# Altium PCB BMS_Rev4.PcbDoc (part 1 of 3)
Units mm, origin at the board's own origin, x right, y up, seen from the top; angles counter-clockwise.
Board outline 63.88 x 34.7 mm, 2 copper layers (Top Layer, Bottom Layer); 62 components, 39 nets, 215 pads, 192 vias.
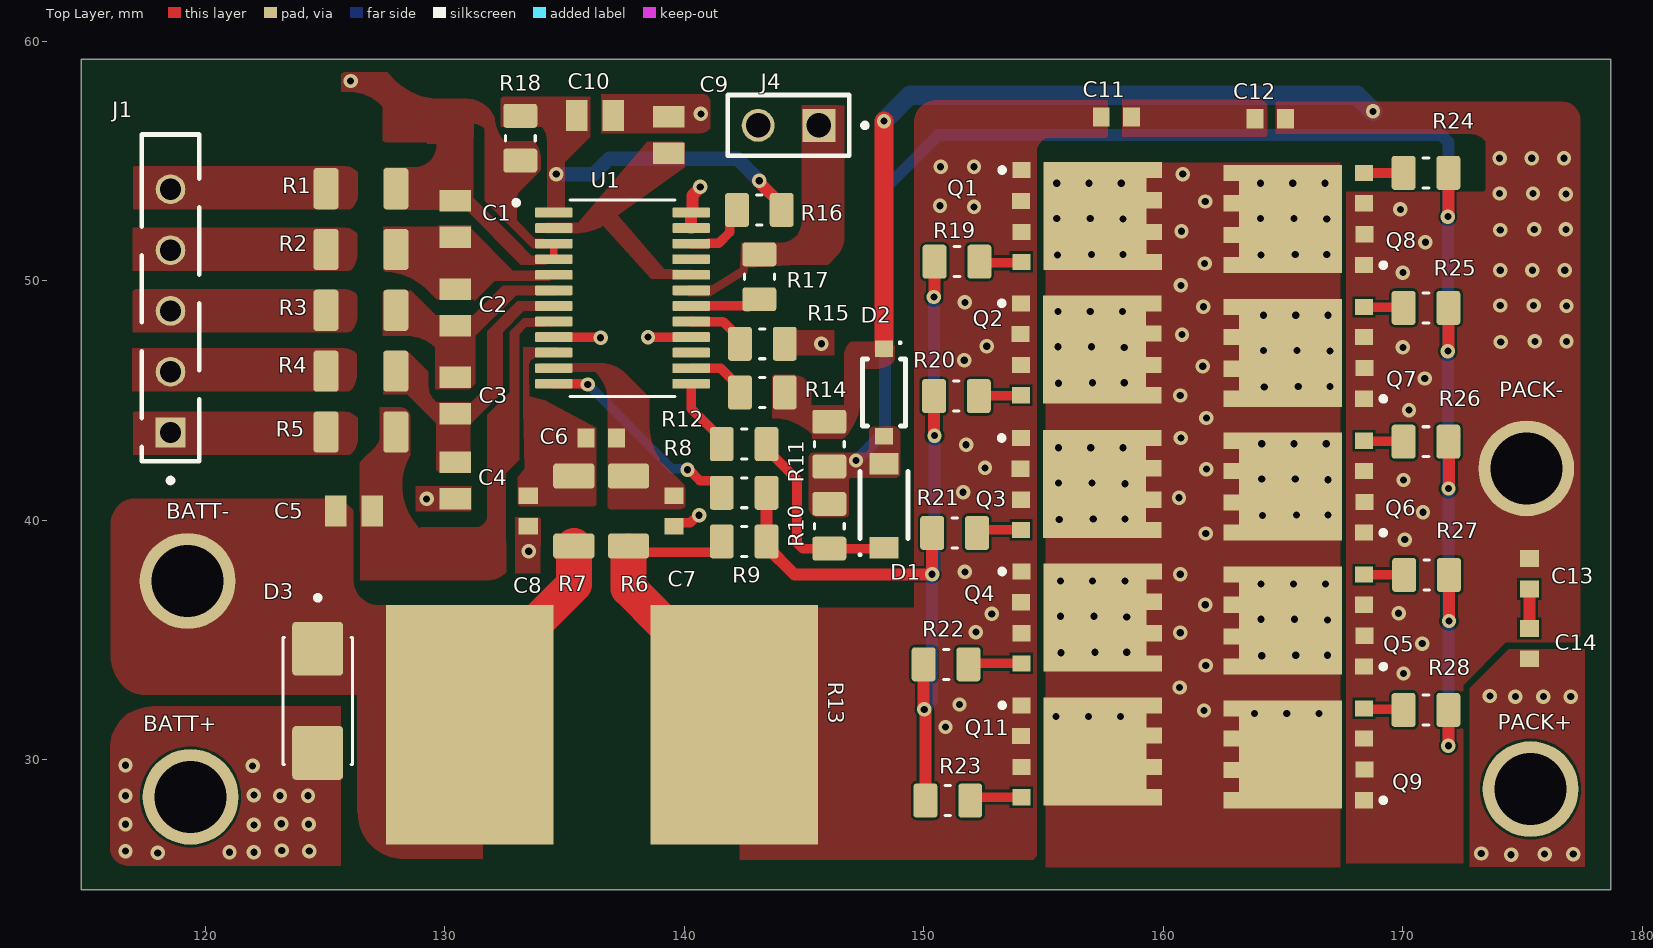
[diagram p0: Top Layer view]
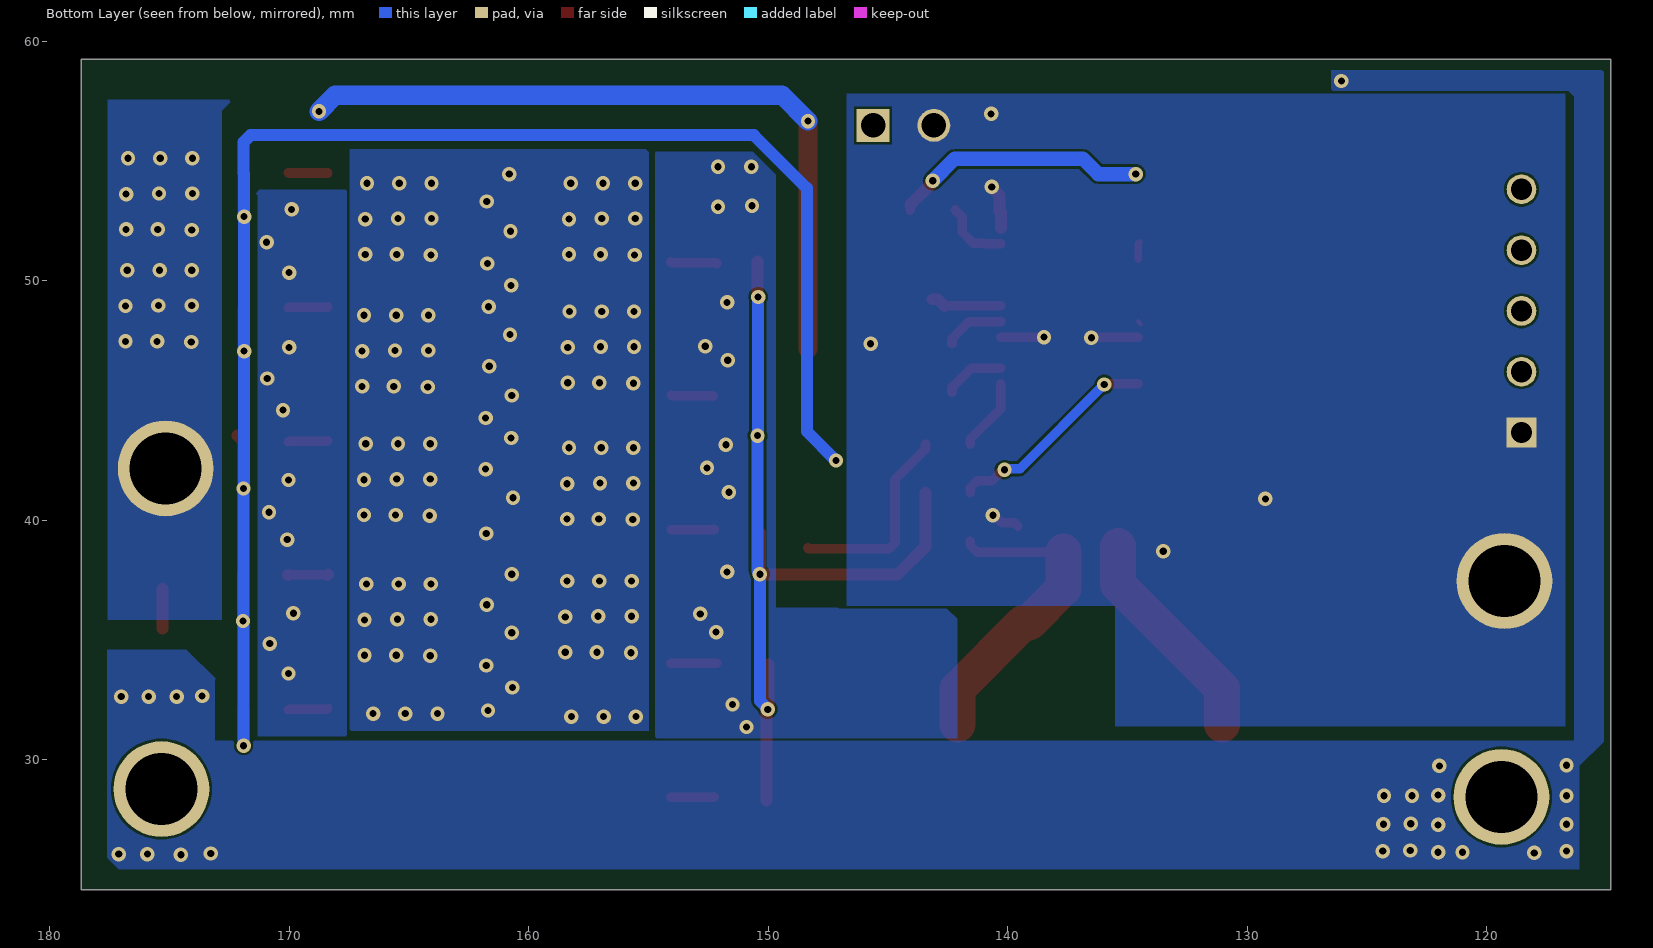
[diagram p1: Bottom Layer view, seen from below]
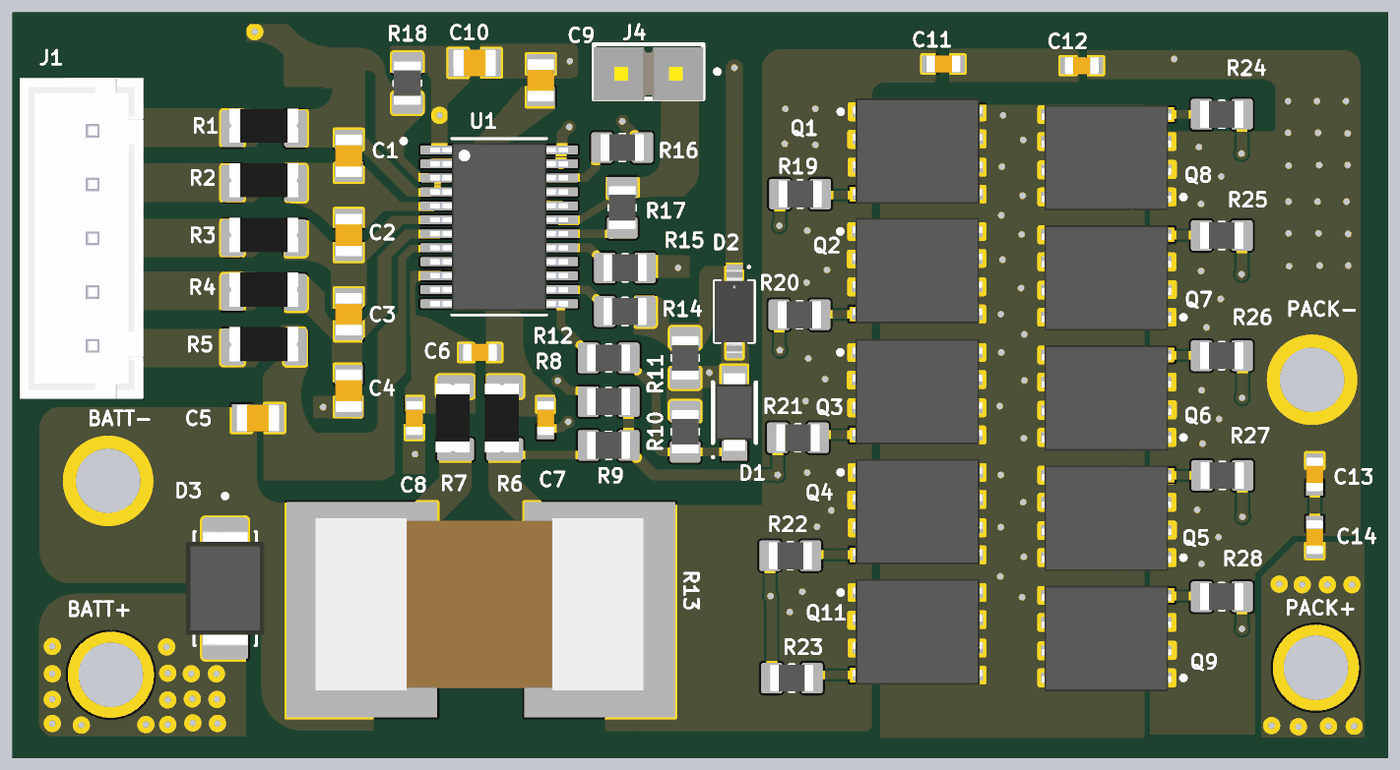
[diagram p3: 3D render of the assembled board from above, using the file's embedded part models]

## Layer stack, top to bottom
Top Solder: solder mask 0.0102, Solder Resist, Dk 3.5
Top Layer: signal copper 0.0356
Dielectric 1: dielectric 0.32, FR-4, Dk 4.8
Bottom Layer: signal copper 0.0356
Bottom Solder: solder mask 0.0102, Solder Resist, Dk 3.5

## Board outline
178.689,59.258 114.808,59.258 114.808,24.562 178.689,24.562

## Design rules (kind name [scope] priority, off if disabled: settings)
Clearance [All] p1: gap=0.1 ignorepadtopadclearanceinfootprint=FALSE
HoleSize [All] p1: absolutevalues=TRUE maxlimit=8 minlimit=0.025 maxpercent=80.000 minpercent=20.000
MinimumSolderMaskSliver [All] p1: minsoldermaskwidth=0.03
PolygonConnect PolygonConnect_45 [All vs IsNamedPolygon('AVDD_L01_P036') Or IsNamedPolygon('BATT+_L01_P000') Or IsNamedPolygon('BATT+_L01_P019') Or IsNamedPolygon('BATT+_L01_P020') Or IsNamedPolygon('BATT+_L01_P026') Or IsNamedPolygon('GND_L01_P013') Or IsNamedPolygon('GND_L01_P034') Or IsNamedPolygon('GND_L01_P035') Or IsNamedPolygon('GND_L01_P037') Or IsNamedPolygon('GND_L01_P040') Or IsNamedPolygon('GND_L01_P044') Or IsNamedPolygon('NETC2_1_L01_P001') Or IsNamedPolygon('NETC3_1_L01_P002') Or IsNamedPolygon('NETC4_1_L01_P003') Or IsNamedPolygon('NETC6_1_L01_P021') Or IsNamedPolygon('NETC6_2_L01_P022') Or IsNamedPolygon('NETC6_2_L01_P043') Or IsNamedPolygon('NETC10_2_L01_P033') Or IsNamedPolygon('NETC11_1_L01_P010') Or IsNamedPolygon('NETC11_2_L01_P032') Or IsNamedPolygon('NETC15_2_L01_P004') Or IsNamedPolygon('NETD1_2_L01_P025') Or IsNamedPolygon('NETJ1_2_L01_P031') Or IsNamedPolygon('NETJ1_3_L01_P030') Or IsNamedPolygon('NETJ1_4_L01_P029') Or IsNamedPolygon('NETJ1_5_L01_P028') Or IsNamedPolygon('NETJ1_6_L01_P027') Or IsNamedPolygon('NETQ1_D_L01_P005') Or IsNamedPolygon('PACK-_L01_P009') Or IsNamedPolygon('PACK-_L01_P023') Or IsNamedPolygon('TH1_L01_P048') Or IsNamedPolygon('BATT+_L02_P012') Or IsNamedPolygon('GND_L02_P014') Or IsNamedPolygon('NETC11_1_L02_P018') Or IsNamedPolygon('NETQ1_D_L02_P015') Or IsNamedPolygon('PACK-_L02_P016') Or IsNamedPolygon('PACK-_L02_P017')] p1: connectstyle=Direct reliefconductorwidth=0.254 reliefentries=4 polygonreliefangle="90 Angle" airgapwidth=0.254
PolygonConnect PolygonConnect_44 [All vs IsNamedPolygon('AVDD_L01_P036') Or IsNamedPolygon('BATT+_L01_P000') Or IsNamedPolygon('BATT+_L01_P019') Or IsNamedPolygon('BATT+_L01_P020') Or IsNamedPolygon('BATT+_L01_P026') Or IsNamedPolygon('GND_L01_P013') Or IsNamedPolygon('GND_L01_P034') Or IsNamedPolygon('GND_L01_P035') Or IsNamedPolygon('GND_L01_P037') Or IsNamedPolygon('GND_L01_P040') Or IsNamedPolygon('GND_L01_P044') Or IsNamedPolygon('NETC2_1_L01_P001') Or IsNamedPolygon('NETC3_1_L01_P002') Or IsNamedPolygon('NETC4_1_L01_P003') Or IsNamedPolygon('NETC6_1_L01_P021') Or IsNamedPolygon('NETC6_2_L01_P022') Or IsNamedPolygon('NETC6_2_L01_P043') Or IsNamedPolygon('NETC10_2_L01_P033') Or IsNamedPolygon('NETC11_1_L01_P010') Or IsNamedPolygon('NETC11_2_L01_P032') Or IsNamedPolygon('NETC15_2_L01_P004') Or IsNamedPolygon('NETD1_2_L01_P025') Or IsNamedPolygon('NETJ1_2_L01_P031') Or IsNamedPolygon('NETJ1_3_L01_P030') Or IsNamedPolygon('NETJ1_4_L01_P029') Or IsNamedPolygon('NETJ1_5_L01_P028') Or IsNamedPolygon('NETJ1_6_L01_P027') Or IsNamedPolygon('NETQ1_D_L01_P005') Or IsNamedPolygon('PACK-_L01_P009') Or IsNamedPolygon('PACK-_L01_P023') Or IsNamedPolygon('TH1_L01_P046') Or IsNamedPolygon('BATT+_L02_P012') Or IsNamedPolygon('GND_L02_P014') Or IsNamedPolygon('NETC11_1_L02_P018') Or IsNamedPolygon('NETQ1_D_L02_P015') Or IsNamedPolygon('PACK-_L02_P016') Or IsNamedPolygon('PACK-_L02_P017')] p2: connectstyle=Direct reliefconductorwidth=0.254 reliefentries=4 polygonreliefangle="90 Angle" airgapwidth=0.254
PolygonConnect PolygonConnect_43 [All vs IsNamedPolygon('AVDD_L01_P036') Or IsNamedPolygon('BATT+_L01_P000') Or IsNamedPolygon('BATT+_L01_P019') Or IsNamedPolygon('BATT+_L01_P020') Or IsNamedPolygon('BATT+_L01_P026') Or IsNamedPolygon('GND_L01_P013') Or IsNamedPolygon('GND_L01_P034') Or IsNamedPolygon('GND_L01_P035') Or IsNamedPolygon('GND_L01_P037') Or IsNamedPolygon('GND_L01_P040') Or IsNamedPolygon('GND_L01_P044') Or IsNamedPolygon('NETC2_1_L01_P001') Or IsNamedPolygon('NETC3_1_L01_P002') Or IsNamedPolygon('NETC4_1_L01_P003') Or IsNamedPolygon('NETC6_1_L01_P021') Or IsNamedPolygon('NETC6_2_L01_P022') Or IsNamedPolygon('NETC6_2_L01_P043') Or IsNamedPolygon('NETC10_2_L01_P033') Or IsNamedPolygon('NETC11_1_L01_P010') Or IsNamedPolygon('NETC11_2_L01_P032') Or IsNamedPolygon('NETC15_2_L01_P004') Or IsNamedPolygon('NETD1_2_L01_P025') Or IsNamedPolygon('NETJ1_2_L01_P031') Or IsNamedPolygon('NETJ1_3_L01_P030') Or IsNamedPolygon('NETJ1_4_L01_P029') Or IsNamedPolygon('NETJ1_5_L01_P028') Or IsNamedPolygon('NETJ1_6_L01_P027') Or IsNamedPolygon('NETQ1_D_L01_P005') Or IsNamedPolygon('NONET_L01_P045') Or IsNamedPolygon('PACK-_L01_P009') Or IsNamedPolygon('PACK-_L01_P023') Or IsNamedPolygon('BATT+_L02_P012') Or IsNamedPolygon('GND_L02_P014') Or IsNamedPolygon('NETC11_1_L02_P018') Or IsNamedPolygon('NETQ1_D_L02_P015') Or IsNamedPolygon('PACK-_L02_P016') Or IsNamedPolygon('PACK-_L02_P017')] p3: connectstyle=Direct reliefconductorwidth=0.254 reliefentries=4 polygonreliefangle="90 Angle" airgapwidth=0.254
PolygonConnect PolygonConnect_42 [All vs IsNamedPolygon('AVDD_L01_P036') Or IsNamedPolygon('BATT+_L01_P000') Or IsNamedPolygon('BATT+_L01_P019') Or IsNamedPolygon('BATT+_L01_P020') Or IsNamedPolygon('BATT+_L01_P026') Or IsNamedPolygon('GND_L01_P013') Or IsNamedPolygon('GND_L01_P034') Or IsNamedPolygon('GND_L01_P035') Or IsNamedPolygon('GND_L01_P037') Or IsNamedPolygon('GND_L01_P040') Or IsNamedPolygon('GND_L01_P044') Or IsNamedPolygon('NETC2_1_L01_P001') Or IsNamedPolygon('NETC3_1_L01_P002') Or IsNamedPolygon('NETC4_1_L01_P003') Or IsNamedPolygon('NETC6_1_L01_P021') Or IsNamedPolygon('NETC6_2_L01_P022') Or IsNamedPolygon('NETC6_2_L01_P043') Or IsNamedPolygon('NETC10_2_L01_P033') Or IsNamedPolygon('NETC11_1_L01_P010') Or IsNamedPolygon('NETC11_2_L01_P032') Or IsNamedPolygon('NETC15_2_L01_P004') Or IsNamedPolygon('NETD1_2_L01_P025') Or IsNamedPolygon('NETJ1_2_L01_P031') Or IsNamedPolygon('NETJ1_3_L01_P030') Or IsNamedPolygon('NETJ1_4_L01_P029') Or IsNamedPolygon('NETJ1_5_L01_P028') Or IsNamedPolygon('NETJ1_6_L01_P027') Or IsNamedPolygon('NETQ1_D_L01_P005') Or IsNamedPolygon('PACK-_L01_P009') Or IsNamedPolygon('PACK-_L01_P023') Or IsNamedPolygon('BATT+_L02_P012') Or IsNamedPolygon('GND_L02_P014') Or IsNamedPolygon('NETC11_1_L02_P018') Or IsNamedPolygon('NETQ1_D_L02_P015') Or IsNamedPolygon('PACK-_L02_P016') Or IsNamedPolygon('PACK-_L02_P017')] p4: connectstyle=Direct reliefconductorwidth=0.254 reliefentries=4 polygonreliefangle="90 Angle" airgapwidth=0.254
PolygonConnect PolygonConnect_41 [All vs IsNamedPolygon('AVDD_L01_P036') Or IsNamedPolygon('BATT+_L01_P000') Or IsNamedPolygon('BATT+_L01_P019') Or IsNamedPolygon('BATT+_L01_P020') Or IsNamedPolygon('BATT+_L01_P026') Or IsNamedPolygon('GND_L01_P013') Or IsNamedPolygon('GND_L01_P034') Or IsNamedPolygon('GND_L01_P035') Or IsNamedPolygon('GND_L01_P037') Or IsNamedPolygon('GND_L01_P039') Or IsNamedPolygon('GND_L01_P040') Or IsNamedPolygon('NETC2_1_L01_P001') Or IsNamedPolygon('NETC3_1_L01_P002') Or IsNamedPolygon('NETC4_1_L01_P003') Or IsNamedPolygon('NETC6_1_L01_P021') Or IsNamedPolygon('NETC6_2_L01_P022') Or IsNamedPolygon('NETC6_2_L01_P043') Or IsNamedPolygon('NETC10_2_L01_P033') Or IsNamedPolygon('NETC11_1_L01_P010') Or IsNamedPolygon('NETC11_2_L01_P032') Or IsNamedPolygon('NETC15_2_L01_P004') Or IsNamedPolygon('NETD1_2_L01_P025') Or IsNamedPolygon('NETJ1_2_L01_P031') Or IsNamedPolygon('NETJ1_3_L01_P030') Or IsNamedPolygon('NETJ1_4_L01_P029') Or IsNamedPolygon('NETJ1_5_L01_P028') Or IsNamedPolygon('NETJ1_6_L01_P027') Or IsNamedPolygon('NETQ1_D_L01_P005') Or IsNamedPolygon('PACK-_L01_P009') Or IsNamedPolygon('PACK-_L01_P023') Or IsNamedPolygon('BATT+_L02_P012') Or IsNamedPolygon('GND_L02_P014') Or IsNamedPolygon('NETC11_1_L02_P018') Or IsNamedPolygon('NETQ1_D_L02_P015') Or IsNamedPolygon('PACK-_L02_P016') Or IsNamedPolygon('PACK-_L02_P017')] p5: connectstyle=Direct reliefconductorwidth=0.254 reliefentries=4 polygonreliefangle="90 Angle" airgapwidth=0.254
PolygonConnect PolygonConnect_40 [All vs IsNamedPolygon('AVDD_L01_P036') Or IsNamedPolygon('BATT+_L01_P000') Or IsNamedPolygon('BATT+_L01_P019') Or IsNamedPolygon('BATT+_L01_P020') Or IsNamedPolygon('BATT+_L01_P026') Or IsNamedPolygon('GND_L01_P013') Or IsNamedPolygon('GND_L01_P034') Or IsNamedPolygon('GND_L01_P035') Or IsNamedPolygon('GND_L01_P037') Or IsNamedPolygon('GND_L01_P039') Or IsNamedPolygon('GND_L01_P040') Or IsNamedPolygon('NETC2_1_L01_P001') Or IsNamedPolygon('NETC3_1_L01_P002') Or IsNamedPolygon('NETC4_1_L01_P003') Or IsNamedPolygon('NETC6_1_L01_P021') Or IsNamedPolygon('NETC6_2_L01_P022') Or IsNamedPolygon('NETC6_2_L01_P043') Or IsNamedPolygon('NETC10_2_L01_P033') Or IsNamedPolygon('NETC11_1_L01_P010') Or IsNamedPolygon('NETC11_2_L01_P032') Or IsNamedPolygon('NETC15_2_L01_P004') Or IsNamedPolygon('NETD1_2_L01_P025') Or IsNamedPolygon('NETJ1_2_L01_P031') Or IsNamedPolygon('NETJ1_3_L01_P030') Or IsNamedPolygon('NETJ1_4_L01_P029') Or IsNamedPolygon('NETJ1_5_L01_P028') Or IsNamedPolygon('NETJ1_6_L01_P027') Or IsNamedPolygon('NETQ1_D_L01_P005') Or IsNamedPolygon('PACK-_L01_P009') Or IsNamedPolygon('PACK-_L01_P023') Or IsNamedPolygon('BATT+_L02_P012') Or IsNamedPolygon('GND_L02_P014') Or IsNamedPolygon('NETC11_1_L02_P018') Or IsNamedPolygon('NETQ1_D_L02_P015') Or IsNamedPolygon('PACK-_L02_P016') Or IsNamedPolygon('PACK-_L02_P017')] p6: connectstyle=Direct reliefconductorwidth=0.254 reliefentries=4 polygonreliefangle="90 Angle" airgapwidth=0.254
PolygonConnect PolygonConnect_39 [All vs IsNamedPolygon('AVDD_L01_P036') Or IsNamedPolygon('BATT+_L01_P000') Or IsNamedPolygon('BATT+_L01_P019') Or IsNamedPolygon('BATT+_L01_P020') Or IsNamedPolygon('BATT+_L01_P026') Or IsNamedPolygon('GND_L01_P013') Or IsNamedPolygon('GND_L01_P034') Or IsNamedPolygon('GND_L01_P035') Or IsNamedPolygon('GND_L01_P037') Or IsNamedPolygon('NETC2_1_L01_P001') Or IsNamedPolygon('NETC3_1_L01_P002') Or IsNamedPolygon('NETC4_1_L01_P003') Or IsNamedPolygon('NETC6_1_L01_P021') Or IsNamedPolygon('NETC6_2_L01_P022') Or IsNamedPolygon('NETC10_2_L01_P033') Or IsNamedPolygon('NETC11_1_L01_P010') Or IsNamedPolygon('NETC11_2_L01_P032') Or IsNamedPolygon('NETC15_2_L01_P004') Or IsNamedPolygon('NETD1_2_L01_P025') Or IsNamedPolygon('NETJ1_2_L01_P031') Or IsNamedPolygon('NETJ1_3_L01_P030') Or IsNamedPolygon('NETJ1_4_L01_P029') Or IsNamedPolygon('NETJ1_5_L01_P028') Or IsNamedPolygon('NETJ1_6_L01_P027') Or IsNamedPolygon('NETQ1_D_L01_P005') Or IsNamedPolygon('PACK-_L01_P009') Or IsNamedPolygon('PACK-_L01_P023') Or IsNamedPolygon('BATT+_L02_P012') Or IsNamedPolygon('GND_L02_P014') Or IsNamedPolygon('NETC11_1_L02_P018') Or IsNamedPolygon('NETQ1_D_L02_P015') Or IsNamedPolygon('PACK-_L02_P016') Or IsNamedPolygon('PACK-_L02_P017')] p7: connectstyle=Direct reliefconductorwidth=0.254 reliefentries=4 polygonreliefangle="90 Angle" airgapwidth=0.254
PolygonConnect PolygonConnect_38 [All vs IsNamedPolygon('AVDD_L01_P036') Or IsNamedPolygon('BATT+_L01_P000') Or IsNamedPolygon('BATT+_L01_P019') Or IsNamedPolygon('BATT+_L01_P020') Or IsNamedPolygon('BATT+_L01_P026') Or IsNamedPolygon('GND_L01_P013') Or IsNamedPolygon('GND_L01_P034') Or IsNamedPolygon('GND_L01_P035') Or IsNamedPolygon('NETC2_1_L01_P001') Or IsNamedPolygon('NETC3_1_L01_P002') Or IsNamedPolygon('NETC4_1_L01_P003') Or IsNamedPolygon('NETC6_1_L01_P021') Or IsNamedPolygon('NETC6_2_L01_P022') Or IsNamedPolygon('NETC10_2_L01_P033') Or IsNamedPolygon('NETC11_1_L01_P010') Or IsNamedPolygon('NETC11_2_L01_P032') Or IsNamedPolygon('NETC15_2_L01_P004') Or IsNamedPolygon('NETD1_2_L01_P025') Or IsNamedPolygon('NETJ1_2_L01_P031') Or IsNamedPolygon('NETJ1_3_L01_P030') Or IsNamedPolygon('NETJ1_4_L01_P029') Or IsNamedPolygon('NETJ1_5_L01_P028') Or IsNamedPolygon('NETJ1_6_L01_P027') Or IsNamedPolygon('NETQ1_D_L01_P005') Or IsNamedPolygon('PACK-_L01_P009') Or IsNamedPolygon('PACK-_L01_P023') Or IsNamedPolygon('BATT+_L02_P012') Or IsNamedPolygon('GND_L02_P014') Or IsNamedPolygon('NETC11_1_L02_P018') Or IsNamedPolygon('NETQ1_D_L02_P015') Or IsNamedPolygon('PACK-_L02_P016') Or IsNamedPolygon('PACK-_L02_P017')] p8: connectstyle=Direct reliefconductorwidth=0.254 reliefentries=4 polygonreliefangle="90 Angle" airgapwidth=0.254
PolygonConnect PolygonConnect_37 [All vs IsNamedPolygon('BATT+_L01_P000') Or IsNamedPolygon('BATT+_L01_P019') Or IsNamedPolygon('BATT+_L01_P020') Or IsNamedPolygon('BATT+_L01_P026') Or IsNamedPolygon('GND_L01_P013') Or IsNamedPolygon('GND_L01_P034') Or IsNamedPolygon('GND_L01_P035') Or IsNamedPolygon('NETC2_1_L01_P001') Or IsNamedPolygon('NETC3_1_L01_P002') Or IsNamedPolygon('NETC4_1_L01_P003') Or IsNamedPolygon('NETC6_1_L01_P021') Or IsNamedPolygon('NETC6_2_L01_P022') Or IsNamedPolygon('NETC10_2_L01_P033') Or IsNamedPolygon('NETC11_1_L01_P010') Or IsNamedPolygon('NETC11_2_L01_P032') Or IsNamedPolygon('NETC15_2_L01_P004') Or IsNamedPolygon('NETD1_2_L01_P025') Or IsNamedPolygon('NETJ1_2_L01_P031') Or IsNamedPolygon('NETJ1_3_L01_P030') Or IsNamedPolygon('NETJ1_4_L01_P029') Or IsNamedPolygon('NETJ1_5_L01_P028') Or IsNamedPolygon('NETJ1_6_L01_P027') Or IsNamedPolygon('NETQ1_D_L01_P005') Or IsNamedPolygon('PACK-_L01_P009') Or IsNamedPolygon('PACK-_L01_P023') Or IsNamedPolygon('BATT+_L02_P012') Or IsNamedPolygon('GND_L02_P014') Or IsNamedPolygon('NETC11_1_L02_P018') Or IsNamedPolygon('NETQ1_D_L02_P015') Or IsNamedPolygon('PACK-_L02_P016') Or IsNamedPolygon('PACK-_L02_P017')] p9: connectstyle=Direct reliefconductorwidth=0.254 reliefentries=4 polygonreliefangle="90 Angle" airgapwidth=0.254
PolygonConnect PolygonConnect_36 [All vs IsNamedPolygon('BATT+_L01_P000') Or IsNamedPolygon('BATT+_L01_P019') Or IsNamedPolygon('BATT+_L01_P020') Or IsNamedPolygon('BATT+_L01_P026') Or IsNamedPolygon('GND_L01_P013') Or IsNamedPolygon('GND_L01_P034') Or IsNamedPolygon('NETC2_1_L01_P001') Or IsNamedPolygon('NETC3_1_L01_P002') Or IsNamedPolygon('NETC4_1_L01_P003') Or IsNamedPolygon('NETC6_1_L01_P021') Or IsNamedPolygon('NETC6_2_L01_P022') Or IsNamedPolygon('NETC10_2_L01_P033') Or IsNamedPolygon('NETC11_1_L01_P010') Or IsNamedPolygon('NETC11_2_L01_P032') Or IsNamedPolygon('NETC15_2_L01_P004') Or IsNamedPolygon('NETD1_2_L01_P025') Or IsNamedPolygon('NETJ1_2_L01_P031') Or IsNamedPolygon('NETJ1_3_L01_P030') Or IsNamedPolygon('NETJ1_4_L01_P029') Or IsNamedPolygon('NETJ1_5_L01_P028') Or IsNamedPolygon('NETJ1_6_L01_P027') Or IsNamedPolygon('NETQ1_D_L01_P005') Or IsNamedPolygon('PACK-_L01_P009') Or IsNamedPolygon('PACK-_L01_P023') Or IsNamedPolygon('BATT+_L02_P012') Or IsNamedPolygon('GND_L02_P014') Or IsNamedPolygon('NETC11_1_L02_P018') Or IsNamedPolygon('NETQ1_D_L02_P015') Or IsNamedPolygon('PACK-_L02_P016') Or IsNamedPolygon('PACK-_L02_P017')] p10: connectstyle=Direct reliefconductorwidth=0.254 reliefentries=4 polygonreliefangle="90 Angle" airgapwidth=0.254
PolygonConnect PolygonConnect_35 [All vs IsNamedPolygon('BATT+_L01_P000') Or IsNamedPolygon('BATT+_L01_P019') Or IsNamedPolygon('BATT+_L01_P020') Or IsNamedPolygon('BATT+_L01_P026') Or IsNamedPolygon('GND_L01_P013') Or IsNamedPolygon('NETC2_1_L01_P001') Or IsNamedPolygon('NETC3_1_L01_P002') Or IsNamedPolygon('NETC4_1_L01_P003') Or IsNamedPolygon('NETC6_1_L01_P021') Or IsNamedPolygon('NETC6_2_L01_P022') Or IsNamedPolygon('NETC10_2_L01_P033') Or IsNamedPolygon('NETC11_1_L01_P010') Or IsNamedPolygon('NETC11_2_L01_P032') Or IsNamedPolygon('NETC15_2_L01_P004') Or IsNamedPolygon('NETD1_2_L01_P025') Or IsNamedPolygon('NETJ1_2_L01_P031') Or IsNamedPolygon('NETJ1_3_L01_P030') Or IsNamedPolygon('NETJ1_4_L01_P029') Or IsNamedPolygon('NETJ1_5_L01_P028') Or IsNamedPolygon('NETJ1_6_L01_P027') Or IsNamedPolygon('NETQ1_D_L01_P005') Or IsNamedPolygon('PACK-_L01_P009') Or IsNamedPolygon('PACK-_L01_P023') Or IsNamedPolygon('BATT+_L02_P012') Or IsNamedPolygon('GND_L02_P014') Or IsNamedPolygon('NETC11_1_L02_P018') Or IsNamedPolygon('NETQ1_D_L02_P015') Or IsNamedPolygon('PACK-_L02_P016') Or IsNamedPolygon('PACK-_L02_P017')] p11: connectstyle=Direct reliefconductorwidth=0.254 reliefentries=4 polygonreliefangle="90 Angle" airgapwidth=0.254
PolygonConnect PolygonConnect_34 [All vs IsNamedPolygon('BATT+_L01_P000') Or IsNamedPolygon('BATT+_L01_P019') Or IsNamedPolygon('BATT+_L01_P020') Or IsNamedPolygon('BATT+_L01_P026') Or IsNamedPolygon('GND_L01_P013') Or IsNamedPolygon('NETC2_1_L01_P001') Or IsNamedPolygon('NETC3_1_L01_P002') Or IsNamedPolygon('NETC4_1_L01_P003') Or IsNamedPolygon('NETC6_1_L01_P021') Or IsNamedPolygon('NETC6_2_L01_P022') Or IsNamedPolygon('NETC11_1_L01_P010') Or IsNamedPolygon('NETC15_2_L01_P004') Or IsNamedPolygon('NETD1_2_L01_P025') Or IsNamedPolygon('NETJ1_2_L01_P031') Or IsNamedPolygon('NETJ1_3_L01_P030') Or IsNamedPolygon('NETJ1_4_L01_P029') Or IsNamedPolygon('NETJ1_5_L01_P028') Or IsNamedPolygon('NETJ1_6_L01_P027') Or IsNamedPolygon('NETQ1_D_L01_P005') Or IsNamedPolygon('NETC11_2_L01_P032') Or IsNamedPolygon('PACK-_L01_P009') Or IsNamedPolygon('PACK-_L01_P023') Or IsNamedPolygon('BATT+_L02_P012') Or IsNamedPolygon('GND_L02_P014') Or IsNamedPolygon('NETC11_1_L02_P018') Or IsNamedPolygon('NETQ1_D_L02_P015') Or IsNamedPolygon('PACK-_L02_P016') Or IsNamedPolygon('PACK-_L02_P017')] p12: connectstyle=Direct reliefconductorwidth=0.254 reliefentries=4 polygonreliefangle="90 Angle" airgapwidth=0.254
PolygonConnect PolygonConnect_33 [All vs IsNamedPolygon('BATT+_L01_P000') Or IsNamedPolygon('BATT+_L01_P019') Or IsNamedPolygon('BATT+_L01_P020') Or IsNamedPolygon('BATT+_L01_P026') Or IsNamedPolygon('GND_L01_P013') Or IsNamedPolygon('NETC2_1_L01_P001') Or IsNamedPolygon('NETC3_1_L01_P002') Or IsNamedPolygon('NETC4_1_L01_P003') Or IsNamedPolygon('NETC6_1_L01_P021') Or IsNamedPolygon('NETC6_2_L01_P022') Or IsNamedPolygon('NETC11_1_L01_P010') Or IsNamedPolygon('NETC15_2_L01_P004') Or IsNamedPolygon('NETD1_2_L01_P025') Or IsNamedPolygon('NETJ1_2_L01_P031') Or IsNamedPolygon('NETJ1_3_L01_P030') Or IsNamedPolygon('NETJ1_4_L01_P029') Or IsNamedPolygon('NETJ1_5_L01_P028') Or IsNamedPolygon('NETJ1_6_L01_P027') Or IsNamedPolygon('NETQ1_D_L01_P005') Or IsNamedPolygon('NETC11_2_L01_P032') Or IsNamedPolygon('PACK-_L01_P009') Or IsNamedPolygon('PACK-_L01_P023') Or IsNamedPolygon('BATT+_L02_P012') Or IsNamedPolygon('GND_L02_P014') Or IsNamedPolygon('NETC11_1_L02_P018') Or IsNamedPolygon('NETQ1_D_L02_P015') Or IsNamedPolygon('PACK-_L02_P016') Or IsNamedPolygon('PACK-_L02_P017')] p13: connectstyle=Direct reliefconductorwidth=0.254 reliefentries=4 polygonreliefangle="90 Angle" airgapwidth=0.254
PolygonConnect PolygonConnect_32 [All vs IsNamedPolygon('BATT+_L01_P000') Or IsNamedPolygon('BATT+_L01_P019') Or IsNamedPolygon('BATT+_L01_P020') Or IsNamedPolygon('BATT+_L01_P026') Or IsNamedPolygon('GND_L01_P013') Or IsNamedPolygon('NETC2_1_L01_P001') Or IsNamedPolygon('NETC3_1_L01_P002') Or IsNamedPolygon('NETC4_1_L01_P003') Or IsNamedPolygon('NETC6_1_L01_P021') Or IsNamedPolygon('NETC6_2_L01_P022') Or IsNamedPolygon('NETC11_1_L01_P010') Or IsNamedPolygon('NETC15_2_L01_P004') Or IsNamedPolygon('NETD1_2_L01_P025') Or IsNamedPolygon('NETJ1_2_L01_P031') Or IsNamedPolygon('NETJ1_3_L01_P030') Or IsNamedPolygon('NETJ1_4_L01_P029') Or IsNamedPolygon('NETJ1_5_L01_P028') Or IsNamedPolygon('NETJ1_6_L01_P027') Or IsNamedPolygon('NETQ1_D_L01_P005') Or IsNamedPolygon('PACK-_L01_P009') Or IsNamedPolygon('PACK-_L01_P023') Or IsNamedPolygon('BATT+_L02_P012') Or IsNamedPolygon('GND_L02_P014') Or IsNamedPolygon('NETC11_1_L02_P018') Or IsNamedPolygon('NETQ1_D_L02_P015') Or IsNamedPolygon('PACK-_L02_P016') Or IsNamedPolygon('PACK-_L02_P017')] p14: connectstyle=Direct reliefconductorwidth=0.254 reliefentries=4 polygonreliefangle="90 Angle" airgapwidth=0.254
PolygonConnect PolygonConnect_31 [All vs IsNamedPolygon('BATT+_L01_P000') Or IsNamedPolygon('BATT+_L01_P019') Or IsNamedPolygon('BATT+_L01_P020') Or IsNamedPolygon('BATT+_L01_P026') Or IsNamedPolygon('GND_L01_P013') Or IsNamedPolygon('NETC2_1_L01_P001') Or IsNamedPolygon('NETC3_1_L01_P002') Or IsNamedPolygon('NETC4_1_L01_P003') Or IsNamedPolygon('NETC6_1_L01_P021') Or IsNamedPolygon('NETC6_2_L01_P022') Or IsNamedPolygon('NETC11_1_L01_P010') Or IsNamedPolygon('NETC15_2_L01_P004') Or IsNamedPolygon('NETD1_2_L01_P025') Or IsNamedPolygon('NETQ1_D_L01_P005') Or IsNamedPolygon('PACK-_L01_P009') Or IsNamedPolygon('PACK-_L01_P023') Or IsNamedPolygon('BATT+_L02_P012') Or IsNamedPolygon('GND_L02_P014') Or IsNamedPolygon('NETC11_1_L02_P018') Or IsNamedPolygon('NETQ1_D_L02_P015') Or IsNamedPolygon('PACK-_L02_P016') Or IsNamedPolygon('PACK-_L02_P017')] p15: connectstyle=Direct reliefconductorwidth=0.254 reliefentries=4 polygonreliefangle="90 Angle" airgapwidth=0.254
PolygonConnect PolygonConnect_30 [All vs IsNamedPolygon('BATT+_L01_P000') Or IsNamedPolygon('BATT+_L01_P019') Or IsNamedPolygon('BATT+_L01_P020') Or IsNamedPolygon('GND_L01_P013') Or IsNamedPolygon('NETC2_1_L01_P001') Or IsNamedPolygon('NETC3_1_L01_P002') Or IsNamedPolygon('NETC4_1_L01_P003') Or IsNamedPolygon('NETC6_1_L01_P021') Or IsNamedPolygon('NETC6_2_L01_P022') Or IsNamedPolygon('NETC11_1_L01_P010') Or IsNamedPolygon('NETC15_2_L01_P004') Or IsNamedPolygon('NETD1_2_L01_P025') Or IsNamedPolygon('NETQ1_D_L01_P005') Or IsNamedPolygon('PACK-_L01_P009') Or IsNamedPolygon('PACK-_L01_P023') Or IsNamedPolygon('BATT+_L02_P012') Or IsNamedPolygon('GND_L02_P014') Or IsNamedPolygon('NETC11_1_L02_P018') Or IsNamedPolygon('NETQ1_D_L02_P015') Or IsNamedPolygon('PACK-_L02_P016') Or IsNamedPolygon('PACK-_L02_P017')] p16: connectstyle=Direct reliefconductorwidth=0.254 reliefentries=4 polygonreliefangle="90 Angle" airgapwidth=0.254
PolygonConnect PolygonConnect_29 [All vs IsNamedPolygon('BATT+_L01_P000') Or IsNamedPolygon('BATT+_L01_P019') Or IsNamedPolygon('BATT+_L01_P020') Or IsNamedPolygon('GND_L01_P013') Or IsNamedPolygon('NETC2_1_L01_P001') Or IsNamedPolygon('NETC3_1_L01_P002') Or IsNamedPolygon('NETC4_1_L01_P003') Or IsNamedPolygon('NETC6_1_L01_P021') Or IsNamedPolygon('NETC6_2_L01_P022') Or IsNamedPolygon('NETC11_1_L01_P010') Or IsNamedPolygon('NETC15_2_L01_P004') Or IsNamedPolygon('NETQ1_D_L01_P005') Or IsNamedPolygon('PACK-_L01_P023') Or IsNamedPolygon('PACK-_L01_P009') Or IsNamedPolygon('BATT+_L02_P012') Or IsNamedPolygon('GND_L02_P014') Or IsNamedPolygon('NETC11_1_L02_P018') Or IsNamedPolygon('NETQ1_D_L02_P015') Or IsNamedPolygon('PACK-_L02_P016') Or IsNamedPolygon('PACK-_L02_P017')] p17: connectstyle=Direct reliefconductorwidth=0.254 reliefentries=4 polygonreliefangle="90 Angle" airgapwidth=0.254
PolygonConnect PolygonConnect_28 [All vs IsNamedPolygon('BATT+_L01_P000') Or IsNamedPolygon('BATT+_L01_P019') Or IsNamedPolygon('BATT+_L01_P020') Or IsNamedPolygon('GND_L01_P013') Or IsNamedPolygon('NETC2_1_L01_P001') Or IsNamedPolygon('NETC3_1_L01_P002') Or IsNamedPolygon('NETC4_1_L01_P003') Or IsNamedPolygon('NETC6_1_L01_P021') Or IsNamedPolygon('NETC6_2_L01_P022') Or IsNamedPolygon('NETC11_1_L01_P010') Or IsNamedPolygon('NETC15_2_L01_P004') Or IsNamedPolygon('NETQ1_D_L01_P005') Or IsNamedPolygon('PACK-_L01_P023') Or IsNamedPolygon('PACK-_L01_P009') Or IsNamedPolygon('BATT+_L02_P012') Or IsNamedPolygon('GND_L02_P014') Or IsNamedPolygon('NETC11_1_L02_P018') Or IsNamedPolygon('NETQ1_D_L02_P015') Or IsNamedPolygon('PACK-_L02_P016') Or IsNamedPolygon('PACK-_L02_P017')] p18: connectstyle=Direct reliefconductorwidth=0.254 reliefentries=4 polygonreliefangle="90 Angle" airgapwidth=0.254
PolygonConnect PolygonConnect_27 [All vs IsNamedPolygon('BATT+_L01_P000') Or IsNamedPolygon('BATT+_L01_P019') Or IsNamedPolygon('BATT+_L01_P020') Or IsNamedPolygon('GND_L01_P013') Or IsNamedPolygon('NETC2_1_L01_P001') Or IsNamedPolygon('NETC3_1_L01_P002') Or IsNamedPolygon('NETC4_1_L01_P003') Or IsNamedPolygon('NETC6_1_L01_P021') Or IsNamedPolygon('NETC6_2_L01_P022') Or IsNamedPolygon('NETC11_1_L01_P010') Or IsNamedPolygon('NETC15_2_L01_P004') Or IsNamedPolygon('NETQ1_D_L01_P005') Or IsNamedPolygon('PACK-_L01_P009') Or IsNamedPolygon('BATT+_L02_P012') Or IsNamedPolygon('GND_L02_P014') Or IsNamedPolygon('NETC11_1_L02_P018') Or IsNamedPolygon('NETQ1_D_L02_P015') Or IsNamedPolygon('PACK-_L02_P016') Or IsNamedPolygon('PACK-_L02_P017')] p19: connectstyle=Direct reliefconductorwidth=0.254 reliefentries=4 polygonreliefangle="90 Angle" airgapwidth=0.254
PolygonConnect PolygonConnect_26 [All vs IsNamedPolygon('BATT+_L01_P000') Or IsNamedPolygon('BATT+_L01_P019') Or IsNamedPolygon('BATT+_L01_P020') Or IsNamedPolygon('GND_L01_P013') Or IsNamedPolygon('NETC2_1_L01_P001') Or IsNamedPolygon('NETC3_1_L01_P002') Or IsNamedPolygon('NETC4_1_L01_P003') Or IsNamedPolygon('NETC6_1_L01_P021') Or IsNamedPolygon('NETC11_1_L01_P010') Or IsNamedPolygon('NETC15_2_L01_P004') Or IsNamedPolygon('NETQ1_D_L01_P005') Or IsNamedPolygon('PACK-_L01_P009') Or IsNamedPolygon('BATT+_L02_P012') Or IsNamedPolygon('GND_L02_P014') Or IsNamedPolygon('NETC11_1_L02_P018') Or IsNamedPolygon('NETQ1_D_L02_P015') Or IsNamedPolygon('PACK-_L02_P016') Or IsNamedPolygon('PACK-_L02_P017')] p20: connectstyle=Direct reliefconductorwidth=0.254 reliefentries=4 polygonreliefangle="90 Angle" airgapwidth=0.254
PolygonConnect PolygonConnect_25 [All vs IsNamedPolygon('BATT+_L01_P000') Or IsNamedPolygon('BATT+_L01_P019') Or IsNamedPolygon('BATT+_L01_P020') Or IsNamedPolygon('GND_L01_P013') Or IsNamedPolygon('NETC2_1_L01_P001') Or IsNamedPolygon('NETC3_1_L01_P002') Or IsNamedPolygon('NETC4_1_L01_P003') Or IsNamedPolygon('NETC11_1_L01_P010') Or IsNamedPolygon('NETC15_2_L01_P004') Or IsNamedPolygon('NETQ1_D_L01_P005') Or IsNamedPolygon('PACK-_L01_P009') Or IsNamedPolygon('BATT+_L02_P012') Or IsNamedPolygon('GND_L02_P014') Or IsNamedPolygon('NETC11_1_L02_P018') Or IsNamedPolygon('NETQ1_D_L02_P015') Or IsNamedPolygon('PACK-_L02_P016') Or IsNamedPolygon('PACK-_L02_P017')] p21: connectstyle=Direct reliefconductorwidth=0.254 reliefentries=4 polygonreliefangle="90 Angle" airgapwidth=0.254
PolygonConnect PolygonConnect_24 [All vs IsNamedPolygon('BATT+_L01_P000') Or IsNamedPolygon('BATT+_L01_P019') Or IsNamedPolygon('BATT+_L01_P020') Or IsNamedPolygon('GND_L01_P013') Or IsNamedPolygon('NETC2_1_L01_P001') Or IsNamedPolygon('NETC3_1_L01_P002') Or IsNamedPolygon('NETC4_1_L01_P003') Or IsNamedPolygon('NETC11_1_L01_P010') Or IsNamedPolygon('NETC15_2_L01_P004') Or IsNamedPolygon('NETQ1_D_L01_P005') Or IsNamedPolygon('PACK-_L01_P009') Or IsNamedPolygon('BATT+_L02_P012') Or IsNamedPolygon('GND_L02_P014') Or IsNamedPolygon('NETC11_1_L02_P018') Or IsNamedPolygon('NETQ1_D_L02_P015') Or IsNamedPolygon('PACK-_L02_P016') Or IsNamedPolygon('PACK-_L02_P017')] p22: thpad.connectstyle=Direct thpad.reliefconductorwidth=0.254 thpad.reliefentries=4 thpad.polygonreliefangle="90 Angle" thpad.airgapwidth=0.254 smdpad.connectstyle=Direct smdpad.reliefconductorwidth=0.254 smdpad.reliefentries=4 smdpad.polygonreliefangle="90 Angle" smdpad.airgapwidth=0.254 via.connectstyle=Relief via.reliefconductorwidth=0.254 via.reliefentries=4 via.polygonreliefangle="90 Angle" via.airgapwidth=0.254
PolygonConnect PolygonConnect_23 [All vs IsNamedPolygon('BATT+_L01_P000') Or IsNamedPolygon('BATT+_L01_P019') Or IsNamedPolygon('BATT+_L01_P020') Or IsNamedPolygon('GND_L01_P013') Or IsNamedPolygon('NETC2_1_L01_P001') Or IsNamedPolygon('NETC3_1_L01_P002') Or IsNamedPolygon('NETC4_1_L01_P003') Or IsNamedPolygon('NETC11_1_L01_P010') Or IsNamedPolygon('NETC15_2_L01_P004') Or IsNamedPolygon('NETQ1_D_L01_P005') Or IsNamedPolygon('PACK-_L01_P009') Or IsNamedPolygon('BATT+_L02_P012') Or IsNamedPolygon('GND_L02_P014') Or IsNamedPolygon('NETC11_1_L02_P018') Or IsNamedPolygon('NETQ1_D_L02_P015') Or IsNamedPolygon('PACK-_L02_P016') Or IsNamedPolygon('PACK-_L02_P017')] p23: thpad.connectstyle=Direct thpad.reliefconductorwidth=0.254 thpad.reliefentries=4 thpad.polygonreliefangle="90 Angle" thpad.airgapwidth=0.254 smdpad.connectstyle=Direct smdpad.reliefconductorwidth=0.254 smdpad.reliefentries=4 smdpad.polygonreliefangle="90 Angle" smdpad.airgapwidth=0.254 via.connectstyle=Relief via.reliefconductorwidth=0.254 via.reliefentries=4 via.polygonreliefangle="90 Angle" via.airgapwidth=0.254
PolygonConnect PolygonConnect_22 [All vs IsNamedPolygon('BATT+_L01_P000') Or IsNamedPolygon('BATT+_L01_P019') Or IsNamedPolygon('BATT+_L01_P020') Or IsNamedPolygon('GND_L01_P013') Or IsNamedPolygon('NETC2_1_L01_P001') Or IsNamedPolygon('NETC3_1_L01_P002') Or IsNamedPolygon('NETC4_1_L01_P003') Or IsNamedPolygon('NETC11_1_L01_P010') Or IsNamedPolygon('NETC15_2_L01_P004') Or IsNamedPolygon('NETQ1_D_L01_P005') Or IsNamedPolygon('PACK-_L01_P009') Or IsNamedPolygon('BATT+_L02_P012') Or IsNamedPolygon('GND_L02_P014') Or IsNamedPolygon('NETC11_1_L02_P018') Or IsNamedPolygon('NETQ1_D_L02_P015') Or IsNamedPolygon('PACK-_L02_P016') Or IsNamedPolygon('PACK-_L02_P017')] p24: thpad.connectstyle=Direct thpad.reliefconductorwidth=0.254 thpad.reliefentries=4 thpad.polygonreliefangle="90 Angle" thpad.airgapwidth=0.254 smdpad.connectstyle=Direct smdpad.reliefconductorwidth=0.254 smdpad.reliefentries=4 smdpad.polygonreliefangle="90 Angle" smdpad.airgapwidth=0.254 via.connectstyle=Relief via.reliefconductorwidth=0.254 via.reliefentries=4 via.polygonreliefangle="90 Angle" via.airgapwidth=0.254
PolygonConnect PolygonConnect_21 [All vs IsNamedPolygon('BATT+_L01_P000') Or IsNamedPolygon('BATT+_L01_P019') Or IsNamedPolygon('BATT+_L01_P020') Or IsNamedPolygon('GND_L01_P013') Or IsNamedPolygon('NETC2_1_L01_P001') Or IsNamedPolygon('NETC3_1_L01_P002') Or IsNamedPolygon('NETC4_1_L01_P003') Or IsNamedPolygon('NETC11_1_L01_P010') Or IsNamedPolygon('NETC15_2_L01_P004') Or IsNamedPolygon('NETQ1_D_L01_P005') Or IsNamedPolygon('PACK-_L01_P009') Or IsNamedPolygon('BATT+_L02_P012') Or IsNamedPolygon('GND_L02_P014') Or IsNamedPolygon('NETC11_1_L02_P018') Or IsNamedPolygon('NETQ1_D_L02_P015') Or IsNamedPolygon('PACK-_L02_P016') Or IsNamedPolygon('PACK-_L02_P017')] p25: thpad.connectstyle=Direct thpad.reliefconductorwidth=0.254 thpad.reliefentries=4 thpad.polygonreliefangle="90 Angle" thpad.airgapwidth=0.254 smdpad.connectstyle=Direct smdpad.reliefconductorwidth=0.254 smdpad.reliefentries=4 smdpad.polygonreliefangle="90 Angle" smdpad.airgapwidth=0.254 via.connectstyle=Relief via.reliefconductorwidth=0.254 via.reliefentries=4 via.polygonreliefangle="90 Angle" via.airgapwidth=0.254
PolygonConnect PolygonConnect_20 [All vs IsNamedPolygon('BATT+_L01_P019') Or IsNamedPolygon('BATT+_L01_P020') Or IsNamedPolygon('GND_L01_P013') Or IsNamedPolygon('NETC2_1_L01_P001') Or IsNamedPolygon('NETC3_1_L01_P002') Or IsNamedPolygon('NETC4_1_L01_P003') Or IsNamedPolygon('NETC11_1_L01_P010') Or IsNamedPolygon('NETC11_1_L01_P011') Or IsNamedPolygon('NETC15_2_L01_P004') Or IsNamedPolygon('NETQ1_D_L01_P005') Or IsNamedPolygon('BATT+_L01_P000') Or IsNamedPolygon('PACK-_L01_P009') Or IsNamedPolygon('BATT+_L02_P012') Or IsNamedPolygon('GND_L02_P014') Or IsNamedPolygon('NETC11_1_L02_P018') Or IsNamedPolygon('NETQ1_D_L02_P015') Or IsNamedPolygon('PACK-_L02_P016') Or IsNamedPolygon('PACK-_L02_P017')] p26: thpad.connectstyle=Direct thpad.reliefconductorwidth=0.254 thpad.reliefentries=4 thpad.polygonreliefangle="90 Angle" thpad.airgapwidth=0.254 smdpad.connectstyle=Direct smdpad.reliefconductorwidth=0.254 smdpad.reliefentries=4 smdpad.polygonreliefangle="90 Angle" smdpad.airgapwidth=0.254 via.connectstyle=Relief via.reliefconductorwidth=0.254 via.reliefentries=4 via.polygonreliefangle="90 Angle" via.airgapwidth=0.254
PolygonConnect PolygonConnect_19 [All vs IsNamedPolygon('BATT+_L01_P019') Or IsNamedPolygon('BATT+_L01_P020') Or IsNamedPolygon('GND_L01_P013') Or IsNamedPolygon('NETC1_1_L01_P000') Or IsNamedPolygon('NETC2_1_L01_P001') Or IsNamedPolygon('NETC3_1_L01_P002') Or IsNamedPolygon('NETC4_1_L01_P003') Or IsNamedPolygon('NETC11_1_L01_P010') Or IsNamedPolygon('NETC11_1_L01_P011') Or IsNamedPolygon('NETC15_2_L01_P004') Or IsNamedPolygon('NETQ1_D_L01_P005') Or IsNamedPolygon('PACK-_L01_P009') Or IsNamedPolygon('BATT+_L02_P012') Or IsNamedPolygon('GND_L02_P014') Or IsNamedPolygon('NETC11_1_L02_P018') Or IsNamedPolygon('NETQ1_D_L02_P015') Or IsNamedPolygon('PACK-_L02_P016') Or IsNamedPolygon('PACK-_L02_P017')] p27: connectstyle=Direct reliefconductorwidth=0.254 reliefentries=4 polygonreliefangle="90 Angle" airgapwidth=0.254
PolygonConnect PolygonConnect_18 [All vs IsNamedPolygon('BATT+_L01_P019') Or IsNamedPolygon('BATT+_L01_P020') Or IsNamedPolygon('GND_L01_P013') Or IsNamedPolygon('NETC1_1_L01_P000') Or IsNamedPolygon('NETC2_1_L01_P001') Or IsNamedPolygon('NETC3_1_L01_P002') Or IsNamedPolygon('NETC4_1_L01_P003') Or IsNamedPolygon('NETC11_1_L01_P010') Or IsNamedPolygon('NETC11_1_L01_P011') Or IsNamedPolygon('NETC15_2_L01_P004') Or IsNamedPolygon('NETQ1_D_L01_P005') Or IsNamedPolygon('PACK-_L01_P009') Or IsNamedPolygon('BATT+_L02_P012') Or IsNamedPolygon('GND_L02_P014') Or IsNamedPolygon('NETC11_1_L02_P018') Or IsNamedPolygon('NETQ1_D_L02_P015') Or IsNamedPolygon('PACK-_L02_P016') Or IsNamedPolygon('PACK-_L02_P017')] p28: thpad.connectstyle=Direct thpad.reliefconductorwidth=0.254 thpad.reliefentries=4 thpad.polygonreliefangle="90 Angle" thpad.airgapwidth=0.254 smdpad.connectstyle=Direct smdpad.reliefconductorwidth=0.254 smdpad.reliefentries=4 smdpad.polygonreliefangle="90 Angle" smdpad.airgapwidth=0.254 via.connectstyle=Relief via.reliefconductorwidth=0.254 via.reliefentries=4 via.polygonreliefangle="90 Angle" via.airgapwidth=0.254
PolygonConnect PolygonConnect_17 [All vs IsNamedPolygon('BATT+_L01_P019')] p29: thpad.connectstyle=Direct thpad.reliefconductorwidth=0.254 thpad.reliefentries=4 thpad.polygonreliefangle="90 Angle" thpad.airgapwidth=0.254 smdpad.connectstyle=Direct smdpad.reliefconductorwidth=0.254 smdpad.reliefentries=4 smdpad.polygonreliefangle="90 Angle" smdpad.airgapwidth=0.254 via.connectstyle=Relief via.reliefconductorwidth=0.254 via.reliefentries=4 via.polygonreliefangle="90 Angle" via.airgapwidth=0.254
PolygonConnect PolygonConnect_16 [All vs IsNamedPolygon('BATT+_L01_P019') Or IsNamedPolygon('GND_L01_P013') Or IsNamedPolygon('NETC1_1_L01_P000') Or IsNamedPolygon('NETC2_1_L01_P001') Or IsNamedPolygon('NETC3_1_L01_P002') Or IsNamedPolygon('NETC4_1_L01_P003') Or IsNamedPolygon('NETC11_1_L01_P010') Or IsNamedPolygon('NETC11_1_L01_P011') Or IsNamedPolygon('NETC15_2_L01_P004') Or IsNamedPolygon('NETQ1_D_L01_P005') Or IsNamedPolygon('PACK-_L01_P009') Or IsNamedPolygon('BATT+_L02_P012') Or IsNamedPolygon('GND_L02_P014') Or IsNamedPolygon('NETC11_1_L02_P018') Or IsNamedPolygon('NETQ1_D_L02_P015') Or IsNamedPolygon('PACK-_L02_P016') Or IsNamedPolygon('PACK-_L02_P017')] p30: thpad.connectstyle=Direct thpad.reliefconductorwidth=0.254 thpad.reliefentries=4 thpad.polygonreliefangle="90 Angle" thpad.airgapwidth=0.254 smdpad.connectstyle=Direct smdpad.reliefconductorwidth=0.254 smdpad.reliefentries=4 smdpad.polygonreliefangle="90 Angle" smdpad.airgapwidth=0.254 via.connectstyle=Relief via.reliefconductorwidth=0.254 via.reliefentries=4 via.polygonreliefangle="90 Angle" via.airgapwidth=0.254
PolygonConnect PolygonConnect_15 [All vs IsNamedPolygon('GND_L01_P013') Or IsNamedPolygon('NETC1_1_L01_P000') Or IsNamedPolygon('NETC2_1_L01_P001') Or IsNamedPolygon('NETC3_1_L01_P002') Or IsNamedPolygon('NETC4_1_L01_P003') Or IsNamedPolygon('NETC11_1_L01_P010') Or IsNamedPolygon('NETC11_1_L01_P011') Or IsNamedPolygon('NETC15_2_L01_P004') Or IsNamedPolygon('NETQ1_D_L01_P005') Or IsNamedPolygon('PACK-_L01_P009') Or IsNamedPolygon('BATT+_L02_P012') Or IsNamedPolygon('GND_L02_P014') Or IsNamedPolygon('NETQ1_D_L02_P015')] p31: thpad.connectstyle=Direct thpad.reliefconductorwidth=0.254 thpad.reliefentries=4 thpad.polygonreliefangle="90 Angle" thpad.airgapwidth=0.254 smdpad.connectstyle=Direct smdpad.reliefconductorwidth=0.254 smdpad.reliefentries=4 smdpad.polygonreliefangle="90 Angle" smdpad.airgapwidth=0.254 via.connectstyle=Relief via.reliefconductorwidth=0.254 via.reliefentries=4 via.polygonreliefangle="90 Angle" via.airgapwidth=0.254
PolygonConnect PolygonConnect_14 [All vs IsNamedPolygon('GND_L01_P013') Or IsNamedPolygon('NETC1_1_L01_P000') Or IsNamedPolygon('NETC2_1_L01_P001') Or IsNamedPolygon('NETC3_1_L01_P002') Or IsNamedPolygon('NETC4_1_L01_P003') Or IsNamedPolygon('NETC11_1_L01_P010') Or IsNamedPolygon('NETC11_1_L01_P011') Or IsNamedPolygon('NETC15_2_L01_P004') Or IsNamedPolygon('NETQ1_D_L01_P005') Or IsNamedPolygon('PACK-_L01_P009') Or IsNamedPolygon('BATT+_L02_P012') Or IsNamedPolygon('GND_L02_P014') Or IsNamedPolygon('NETQ1_D_L02_P015')] p32: thpad.connectstyle=Direct thpad.reliefconductorwidth=0.254 thpad.reliefentries=4 thpad.polygonreliefangle="90 Angle" thpad.airgapwidth=0.254 smdpad.connectstyle=Direct smdpad.reliefconductorwidth=0.254 smdpad.reliefentries=4 smdpad.polygonreliefangle="90 Angle" smdpad.airgapwidth=0.254 via.connectstyle=Relief via.reliefconductorwidth=0.254 via.reliefentries=4 via.polygonreliefangle="90 Angle" via.airgapwidth=0.254
PolygonConnect PolygonConnect_13 [All vs IsNamedPolygon('GND_L01_P013') Or IsNamedPolygon('NETC1_1_L01_P000') Or IsNamedPolygon('NETC2_1_L01_P001') Or IsNamedPolygon('NETC3_1_L01_P002') Or IsNamedPolygon('NETC4_1_L01_P003') Or IsNamedPolygon('NETC11_1_L01_P010') Or IsNamedPolygon('NETC11_1_L01_P011') Or IsNamedPolygon('NETC15_2_L01_P004') Or IsNamedPolygon('NETQ1_D_L01_P005') Or IsNamedPolygon('PACK-_L01_P009') Or IsNamedPolygon('BATT+_L02_P012') Or IsNamedPolygon('GND_L02_P014')] p33: thpad.connectstyle=Direct thpad.reliefconductorwidth=0.254 thpad.reliefentries=4 thpad.polygonreliefangle="90 Angle" thpad.airgapwidth=0.254 smdpad.connectstyle=Direct smdpad.reliefconductorwidth=0.254 smdpad.reliefentries=4 smdpad.polygonreliefangle="90 Angle" smdpad.airgapwidth=0.254 via.connectstyle=Relief via.reliefconductorwidth=0.254 via.reliefentries=4 via.polygonreliefangle="90 Angle" via.airgapwidth=0.254
PolygonConnect PolygonConnect_12 [All vs IsNamedPolygon('GND_L01_P013') Or IsNamedPolygon('NETC1_1_L01_P000') Or IsNamedPolygon('NETC2_1_L01_P001') Or IsNamedPolygon('NETC3_1_L01_P002') Or IsNamedPolygon('NETC4_1_L01_P003') Or IsNamedPolygon('NETC11_1_L01_P010') Or IsNamedPolygon('NETC11_1_L01_P011') Or IsNamedPolygon('NETC15_2_L01_P004') Or IsNamedPolygon('NETQ1_D_L01_P005') Or IsNamedPolygon('PACK-_L01_P009') Or IsNamedPolygon('BATT+_L02_P012')] p34: thpad.connectstyle=Direct thpad.reliefconductorwidth=0.254 thpad.reliefentries=4 thpad.polygonreliefangle="90 Angle" thpad.airgapwidth=0.254 smdpad.connectstyle=Direct smdpad.reliefconductorwidth=0.254 smdpad.reliefentries=4 smdpad.polygonreliefangle="90 Angle" smdpad.airgapwidth=0.254 via.connectstyle=Relief via.reliefconductorwidth=0.254 via.reliefentries=4 via.polygonreliefangle="90 Angle" via.airgapwidth=0.254
PolygonConnect PolygonConnect_11 [All vs IsNamedPolygon('NETC1_1_L01_P000') Or IsNamedPolygon('NETC2_1_L01_P001') Or IsNamedPolygon('NETC3_1_L01_P002') Or IsNamedPolygon('NETC4_1_L01_P003') Or IsNamedPolygon('NETC11_1_L01_P010') Or IsNamedPolygon('NETC11_1_L01_P011') Or IsNamedPolygon('NETC15_2_L01_P004') Or IsNamedPolygon('NETQ1_D_L01_P005') Or IsNamedPolygon('PACK-_L01_P009') Or IsNamedPolygon('BATT+_L02_P012')] p35: thpad.connectstyle=Direct thpad.reliefconductorwidth=0.254 thpad.reliefentries=4 thpad.polygonreliefangle="90 Angle" thpad.airgapwidth=0.254 smdpad.connectstyle=Direct smdpad.reliefconductorwidth=0.254 smdpad.reliefentries=4 smdpad.polygonreliefangle="90 Angle" smdpad.airgapwidth=0.254 via.connectstyle=Relief via.reliefconductorwidth=0.254 via.reliefentries=4 via.polygonreliefangle="90 Angle" via.airgapwidth=0.254
PolygonConnect PolygonConnect_10 [All vs IsNamedPolygon('NETC1_1_L01_P000') Or IsNamedPolygon('NETC2_1_L01_P001') Or IsNamedPolygon('NETC3_1_L01_P002') Or IsNamedPolygon('NETC4_1_L01_P003') Or IsNamedPolygon('NETC11_1_L01_P010') Or IsNamedPolygon('NETC11_1_L01_P011') Or IsNamedPolygon('NETC15_2_L01_P004') Or IsNamedPolygon('NETQ1_D_L01_P005') Or IsNamedPolygon('PACK-_L01_P009')] p36: thpad.connectstyle=Direct thpad.reliefconductorwidth=0.254 thpad.reliefentries=4 thpad.polygonreliefangle="90 Angle" thpad.airgapwidth=0.254 smdpad.connectstyle=Direct smdpad.reliefconductorwidth=0.254 smdpad.reliefentries=4 smdpad.polygonreliefangle="90 Angle" smdpad.airgapwidth=0.254 via.connectstyle=Relief via.reliefconductorwidth=0.254 via.reliefentries=4 via.polygonreliefangle="90 Angle" via.airgapwidth=0.254
PolygonConnect PolygonConnect_9 [All vs IsNamedPolygon('NETC1_1_L01_P000') Or IsNamedPolygon('NETC2_1_L01_P001') Or IsNamedPolygon('NETC3_1_L01_P002') Or IsNamedPolygon('NETC4_1_L01_P003') Or IsNamedPolygon('NETC11_1_L01_P010') Or IsNamedPolygon('NETC15_2_L01_P004') Or IsNamedPolygon('NETQ1_D_L01_P005') Or IsNamedPolygon('PACK-_L01_P009')] p37: thpad.connectstyle=Direct thpad.reliefconductorwidth=0.254 thpad.reliefentries=4 thpad.polygonreliefangle="90 Angle" thpad.airgapwidth=0.254 smdpad.connectstyle=Direct smdpad.reliefconductorwidth=0.254 smdpad.reliefentries=4 smdpad.polygonreliefangle="90 Angle" smdpad.airgapwidth=0.254 via.connectstyle=Relief via.reliefconductorwidth=0.254 via.reliefentries=4 via.polygonreliefangle="90 Angle" via.airgapwidth=0.254
PolygonConnect PolygonConnect_8 [All vs IsNamedPolygon('NETC1_1_L01_P000') Or IsNamedPolygon('NETC2_1_L01_P001') Or IsNamedPolygon('NETC3_1_L01_P002') Or IsNamedPolygon('NETC4_1_L01_P003') Or IsNamedPolygon('NETC15_2_L01_P004') Or IsNamedPolygon('NETQ1_D_L01_P005') Or IsNamedPolygon('PACK-_L01_P009')] p38: thpad.connectstyle=Direct thpad.reliefconductorwidth=0.254 thpad.reliefentries=4 thpad.polygonreliefangle="90 Angle" thpad.airgapwidth=0.254 smdpad.connectstyle=Direct smdpad.reliefconductorwidth=0.254 smdpad.reliefentries=4 smdpad.polygonreliefangle="90 Angle" smdpad.airgapwidth=0.254 via.connectstyle=Relief via.reliefconductorwidth=0.254 via.reliefentries=4 via.polygonreliefangle="90 Angle" via.airgapwidth=0.254
PolygonConnect PolygonConnect_7 [All vs IsNamedPolygon('NETC1_1_L01_P000')] p39: thpad.connectstyle=Direct thpad.reliefconductorwidth=0.254 thpad.reliefentries=4 thpad.polygonreliefangle="90 Angle" thpad.airgapwidth=0.254 smdpad.connectstyle=Direct smdpad.reliefconductorwidth=0.254 smdpad.reliefentries=4 smdpad.polygonreliefangle="90 Angle" smdpad.airgapwidth=0.254 via.connectstyle=Relief via.reliefconductorwidth=0.254 via.reliefentries=4 via.polygonreliefangle="90 Angle" via.airgapwidth=0.254
PolygonConnect PolygonConnect_6 [All vs IsNamedPolygon('NETC1_1_L01_P000') Or IsNamedPolygon('NETC2_1_L01_P001') Or IsNamedPolygon('NETC3_1_L01_P002') Or IsNamedPolygon('NETC4_1_L01_P003') Or IsNamedPolygon('NETC15_2_L01_P004') Or IsNamedPolygon('NETQ1_D_L01_P005')] p40: thpad.connectstyle=Direct thpad.reliefconductorwidth=0.254 thpad.reliefentries=4 thpad.polygonreliefangle="90 Angle" thpad.airgapwidth=0.254 smdpad.connectstyle=Direct smdpad.reliefconductorwidth=0.254 smdpad.reliefentries=4 smdpad.polygonreliefangle="90 Angle" smdpad.airgapwidth=0.254 via.connectstyle=Relief via.reliefconductorwidth=0.254 via.reliefentries=4 via.polygonreliefangle="90 Angle" via.airgapwidth=0.254
PolygonConnect PolygonConnect_5 [All vs IsNamedPolygon('NETC1_1_L01_P000') Or IsNamedPolygon('NETC2_1_L01_P001') Or IsNamedPolygon('NETC3_1_L01_P002') Or IsNamedPolygon('NETC4_1_L01_P003') Or IsNamedPolygon('NETC15_2_L01_P004')] p41: thpad.connectstyle=Direct thpad.reliefconductorwidth=0.254 thpad.reliefentries=4 thpad.polygonreliefangle="90 Angle" thpad.airgapwidth=0.254 smdpad.connectstyle=Direct smdpad.reliefconductorwidth=0.254 smdpad.reliefentries=4 smdpad.polygonreliefangle="90 Angle" smdpad.airgapwidth=0.254 via.connectstyle=Relief via.reliefconductorwidth=0.254 via.reliefentries=4 via.polygonreliefangle="90 Angle" via.airgapwidth=0.254
PolygonConnect PolygonConnect_4 [All vs IsNamedPolygon('NETC1_1_L01_P000') Or IsNamedPolygon('NETC2_1_L01_P001') Or IsNamedPolygon('NETC3_1_L01_P002') Or IsNamedPolygon('NETC4_1_L01_P003')] p42: thpad.connectstyle=Direct thpad.reliefconductorwidth=0.254 thpad.reliefentries=4 thpad.polygonreliefangle="90 Angle" thpad.airgapwidth=0.254 smdpad.connectstyle=Direct smdpad.reliefconductorwidth=0.254 smdpad.reliefentries=4 smdpad.polygonreliefangle="90 Angle" smdpad.airgapwidth=0.254 via.connectstyle=Relief via.reliefconductorwidth=0.254 via.reliefentries=4 via.polygonreliefangle="90 Angle" via.airgapwidth=0.254
PolygonConnect PolygonConnect_3 [All vs IsNamedPolygon('NETC1_1_L01_P000') Or IsNamedPolygon('NETC2_1_L01_P001') Or IsNamedPolygon('NETC3_1_L01_P002')] p43: thpad.connectstyle=Direct thpad.reliefconductorwidth=0.254 thpad.reliefentries=4 thpad.polygonreliefangle="90 Angle" thpad.airgapwidth=0.254 smdpad.connectstyle=Direct smdpad.reliefconductorwidth=0.254 smdpad.reliefentries=4 smdpad.polygonreliefangle="90 Angle" smdpad.airgapwidth=0.254 via.connectstyle=Relief via.reliefconductorwidth=0.254 via.reliefentries=4 via.polygonreliefangle="90 Angle" via.airgapwidth=0.254
PolygonConnect PolygonConnect_2 [All vs IsNamedPolygon('NETC1_1_L01_P000') Or IsNamedPolygon('NETC2_1_L01_P001')] p44: thpad.connectstyle=Direct thpad.reliefconductorwidth=0.254 thpad.reliefentries=4 thpad.polygonreliefangle="90 Angle" thpad.airgapwidth=0.254 smdpad.connectstyle=Direct smdpad.reliefconductorwidth=0.254 smdpad.reliefentries=4 smdpad.polygonreliefangle="90 Angle" smdpad.airgapwidth=0.254 via.connectstyle=Relief via.reliefconductorwidth=0.254 via.reliefentries=4 via.polygonreliefangle="90 Angle" via.airgapwidth=0.254
PolygonConnect PolygonConnect_1 [All vs IsNamedPolygon('NETC1_1_L01_P000')] p45: thpad.connectstyle=Direct thpad.reliefconductorwidth=0.254 thpad.reliefentries=4 thpad.polygonreliefangle="90 Angle" thpad.airgapwidth=0.254 smdpad.connectstyle=Direct smdpad.reliefconductorwidth=0.254 smdpad.reliefentries=4 smdpad.polygonreliefangle="90 Angle" smdpad.airgapwidth=0.254 via.connectstyle=Relief via.reliefconductorwidth=0.254 via.reliefentries=4 via.polygonreliefangle="90 Angle" via.airgapwidth=0.254
PolygonConnect [All] p46: connectstyle=Relief reliefconductorwidth=0.254 reliefentries=4 polygonreliefangle="90 Angle" airgapwidth=0.254
RoutingVias [All] p1: holewidth=0.3 width=0.6 viastyle="Through Hole" minholewidth=0.2 minwidth=0.5 maxholewidth=5 maxwidth=7
SilkToSilkClearance [All] p1: silktosilkclearance=0.1
SilkToSolderMaskClearance [IsPad] p1: minsilkscreentomaskgap=0.1 clearancetoexposedcopper=TRUE
SolderMaskExpansion [All] p1: expansion=0.102 istentingtop=FALSE
SupplyNets "Schematic Supply Nets" [InNet('GND')] p1: voltage=0.000
Width [All] p1: maxlimit=3 minlimit=0.1 preferedwidth=0.254 bottomlayer_maxwidth=1.2 minimp=50.000000 maximp=50.000000 favimp=50.000000
26 further rules are at their usual default settings.

## Components (designator, comment, footprint, x,y, rotation, side; value= is the part's Value field where it differs from the comment)
BATT+ "Pads" PADSPACK#1 118.999,29.718 r90 top
BATT- "Pads" PADSPACK#2 118.872,38.735 r90 top
C1 "1uF" WCAP-CSGP_0805_L2W1.25H0.6_WAVE 130.429,52.578 r90 top
C2 "1uF" WCAP-CSGP_0805_L2W1.25H0.6_WAVE 130.429,48.895 r90 top (schematic designator C3)
C3 "1uF" WCAP-CSGP_0805_L2W1.25H0.6_WAVE 130.429,45.212 r90 top (schematic designator C4)
C4 "1uF" WCAP-CSGP_0805_L2W1.25H0.6_WAVE 130.429,41.656 r270 top (schematic designator C5)
C5 "1uF" WCAP-CSGP_0805_L2W1.25H0.6_WAVE 126.213,40.386 r0 top (schematic designator C15)
C6 "0.1uF" WCAP-CSGP_0603_L1.6W0.8H0.8_WAVE 136.525,43.434 r0 top value=100nF
C7 "0.1uF" WCAP-CSGP_0603_L1.6W0.8H0.8_WAVE 139.573,40.386 r90 top value=100nF
C8 "0.1uF" WCAP-CSGP_0603_L1.6W0.8H0.8_WAVE 133.477,40.386 r90 top value=100nF
C9 "1uF" WCAP-CSGP_0805_L2W1.25H0.6_WAVE 139.344,56.083 r270 top
C10 "1uF" WCAP-CSGP_0805_L2W1.25H0.6_WAVE 136.271,56.896 r180 top
C11 "0.1uF" WCAP-CSGP_0603_L1.6W0.8H0.8_WAVE 158.039,56.845 r0 top value=100nF
C12 "0.1uF" WCAP-CSGP_0603_L1.6W0.8H0.8_WAVE 164.465,56.769 r0 top value=100nF
C13 "0.1uF,25V" WCAP-CSGP_0603_L1.6W0.8H0.8_WAVE 175.285,37.77 r270 top value=100nF
C14 "0.1uF" WCAP-CSGP_0603_L1.6W0.8H0.8_WAVE 175.285,34.849 r270 top value=100nF
D1 "1655-1N4007FLCT-ND" DIODE(SOD) 148.336,40.64 r90 top
D2 "SZMMSZ5246BT1G" ZENER(SOD123) 148.336,45.339 r270 top (schematic designator D3)
D3 "SMBJ26A-13-F,26V" DIOM5336X250N 124.689,32.461 r270 top (schematic designator D5)
J1 "Comment" "6 pin header" 118.542,43.663 r90 top
J4 "Header" HEADER(4PIN) 144.475,56.49 r0 top
PACK+ "Pads" PADSPACK#1 174.955,30.048 r90 top
PACK- "Pads" PADSPACK#2 174.777,43.434 r90 top
Q1 "CSD17310Q5A" MOSFET_CSD19531Q5A 156.845,52.705 r0 top
Q2 "CSD17310Q5A" MOSFET_CSD19531Q5A 156.827,47.142 r0 top
Q3 "CSD17310Q5A" MOSFET_CSD19531Q5A 156.827,41.517 r0 top
Q4 "CSD17310Q5A" MOSFET_CSD19531Q5A 156.845,35.941 r0 top
Q5 "CSD17310Q5A" MOSFET_CSD19531Q5A 165.608,35.814 r180 top
Q6 "CSD17310Q5A" MOSFET_CSD19531Q5A 165.608,41.402 r180 top
Q7 "CSD17310Q5A" MOSFET_CSD19531Q5A 165.608,46.99 r180 top
Q8 "CSD17310Q5A" MOSFET_CSD19531Q5A 165.608,52.578 r180 top
Q9 "CSD17310Q5A" MOSFET_CSD19531Q5A 165.608,30.226 r180 top
Q11 "CSD17310Q5A" MOSFET_CSD19531Q5A 156.845,30.353 r0 top
R1 "100R" RESC3115X65N 126.492,53.848 r0 top
R2 "100R" RESC3115X65N 126.492,51.308 r0 top (schematic designator R3)
R3 "100R" RESC3115X65N 126.492,48.768 r0 top (schematic designator R4)